# Altium PCB Pcb1.PcbDoc
Units mm, origin at the board's own origin, x right, y up, seen from the top; angles counter-clockwise.
Board outline 26 x 37 mm, 2 copper layers (Top Layer, Bottom Layer), stack 1.569 mm thick; 22 components, 17 nets, 64 pads, 88 vias.
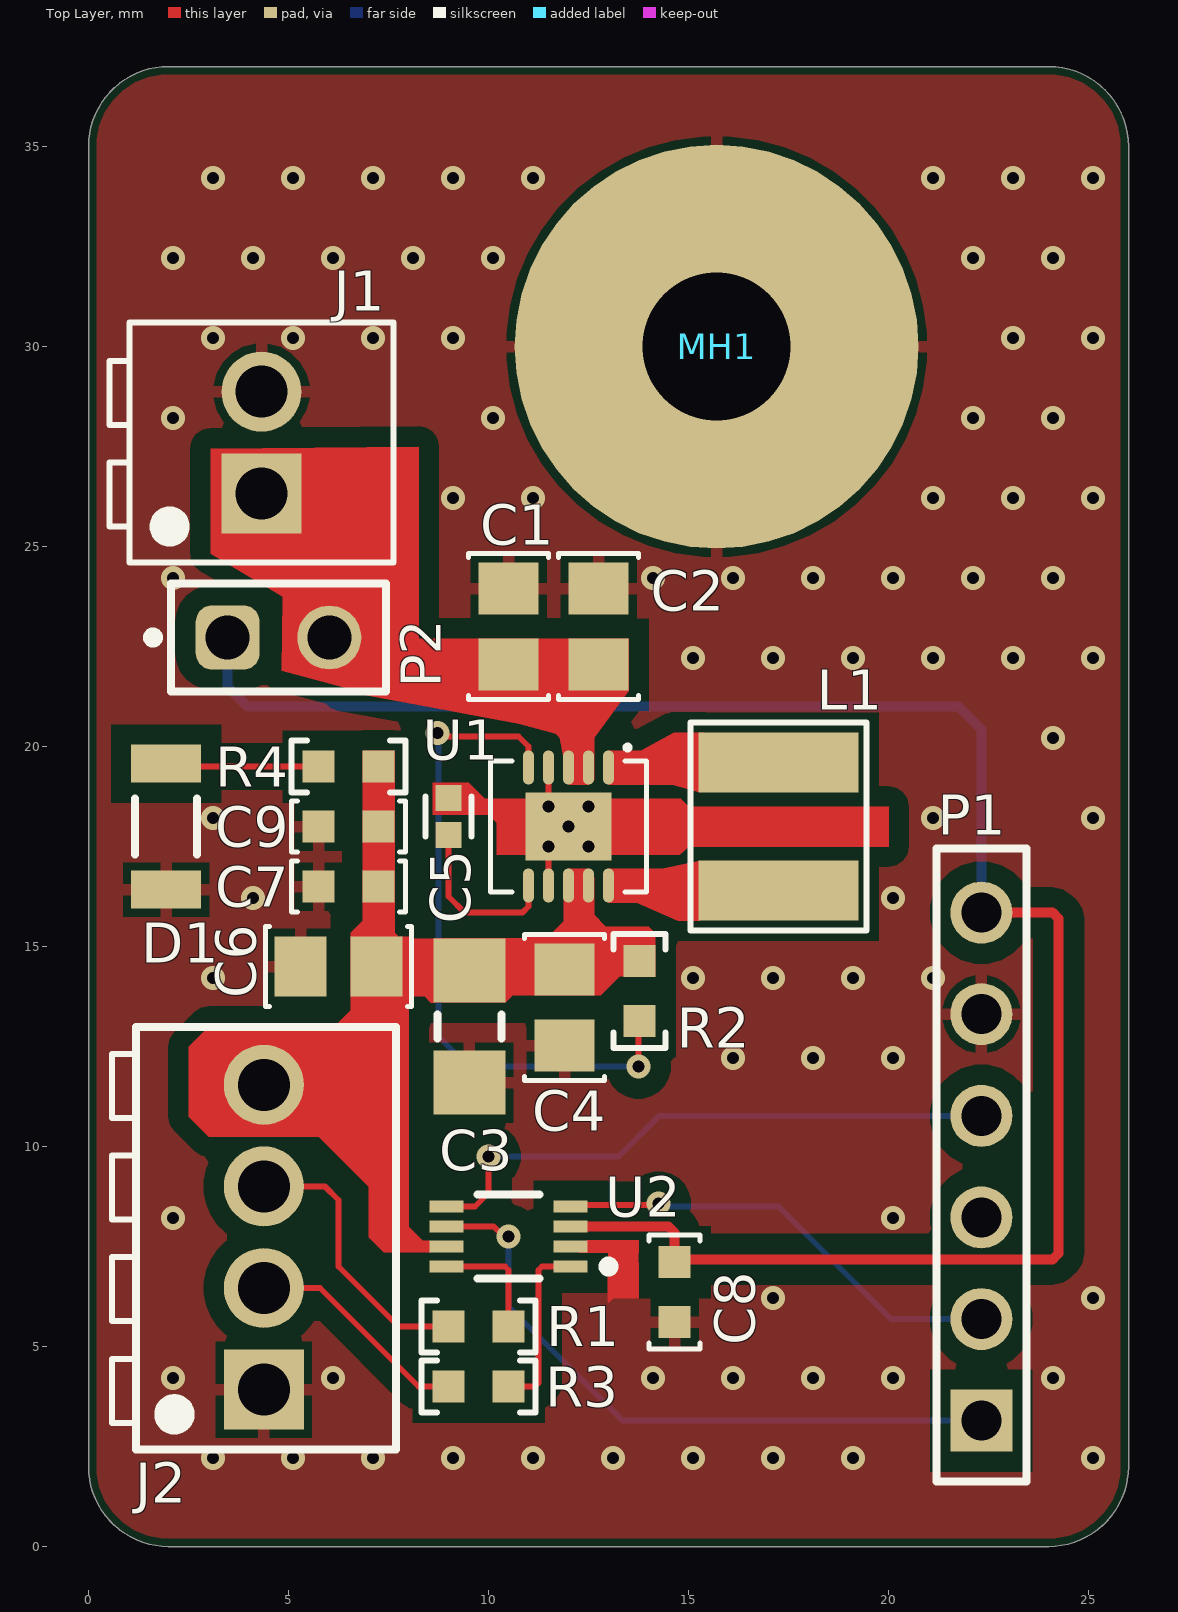
[diagram p0: Top Layer view]
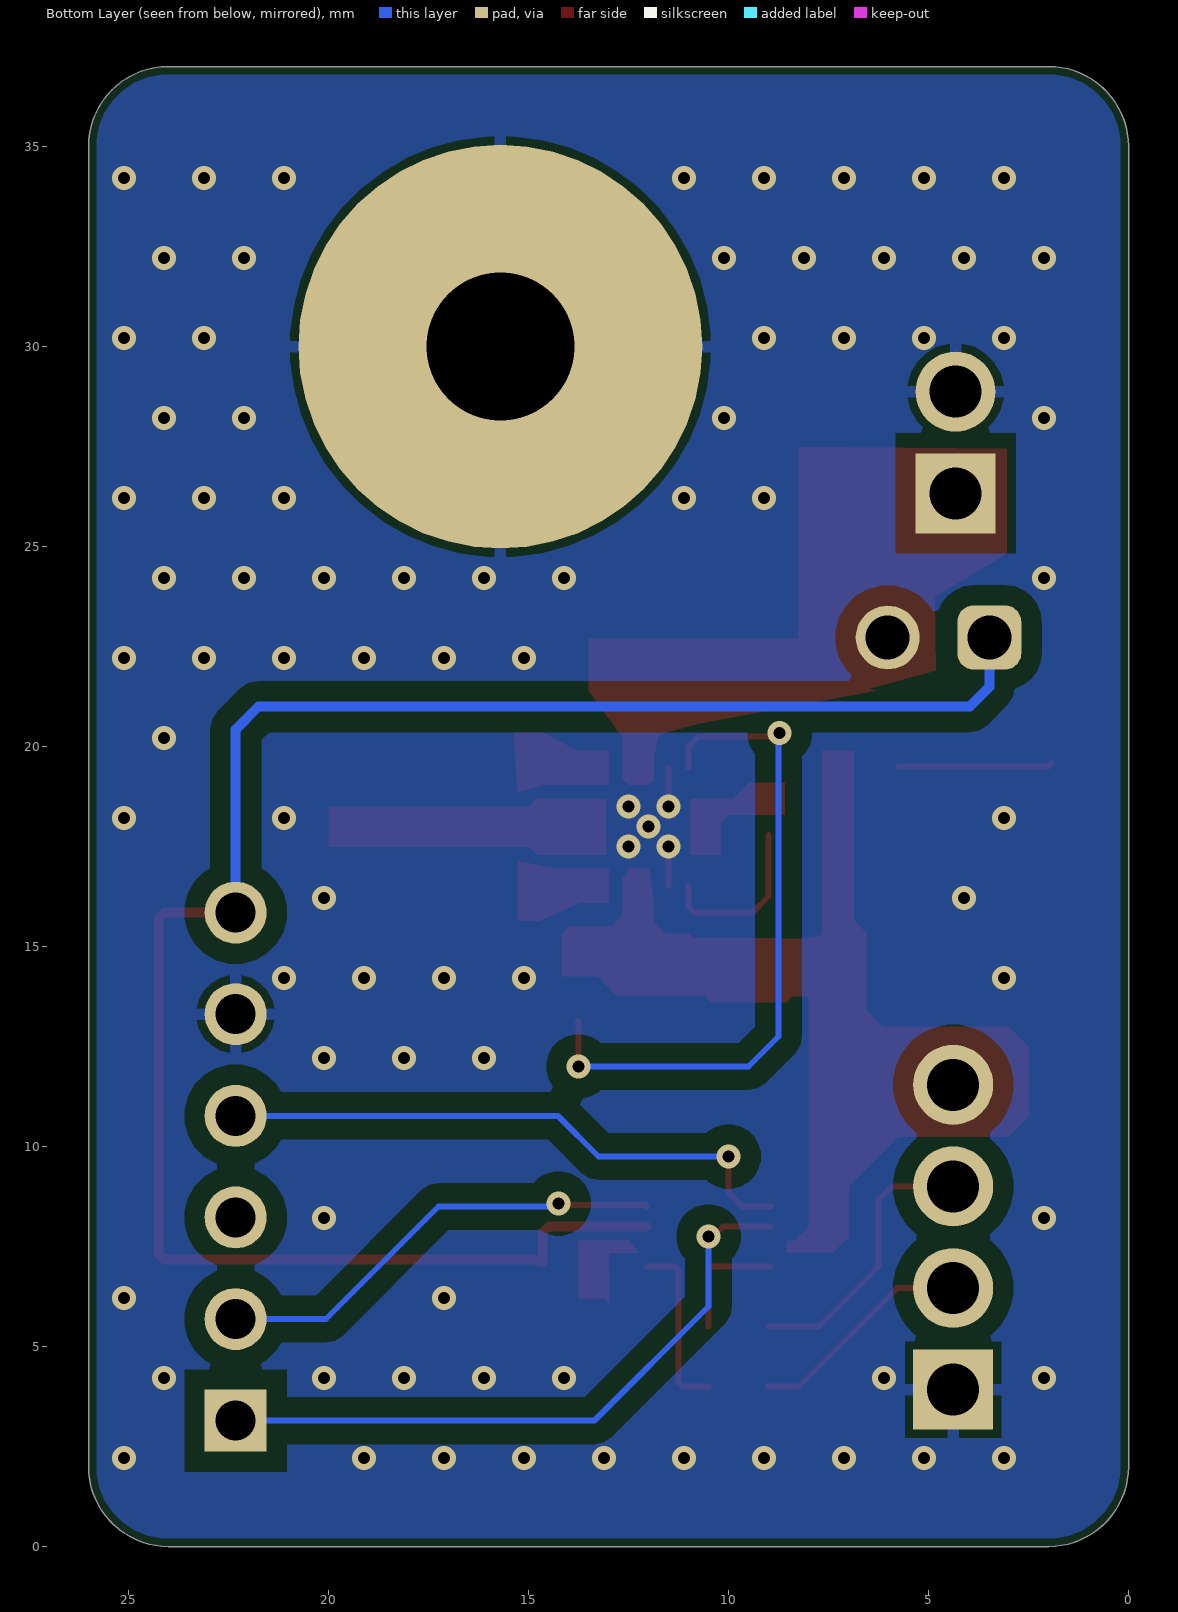
[diagram p1: Bottom Layer view, seen from below]
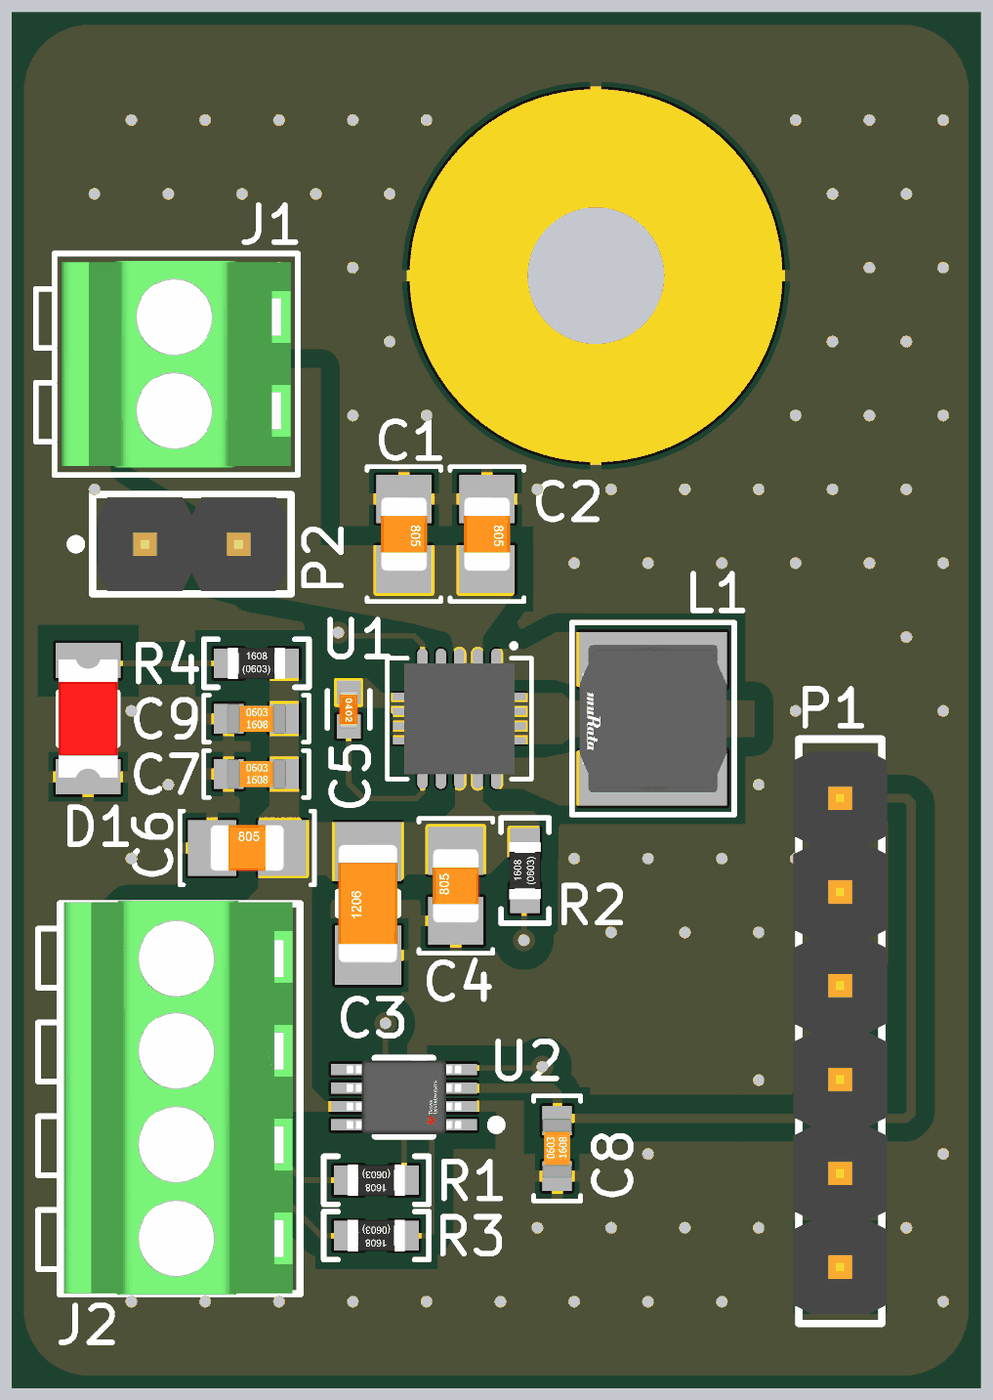
[diagram p2: 3D render of the assembled board from above, using the file's embedded part models]

## Layer stack, top to bottom
Top Solder: solder mask 0.0254, SM-001, Dk 4
Top Layer: signal copper 0.035
Dielectric 1: core 1.4986, Core-043, Dk 4.3
Bottom Layer: signal copper 0.035
Bottom Solder: solder mask 0.0254, SM-001, Dk 4

## Board outline
2,0 cw(c2,2) 0,2 0,35 cw(c2,35) 2,37 24,37 cw(c24,35) 26,35 26,2 cw(c24,2) 24,0

## Design rules (kind name [scope] priority, off if disabled: settings)
BoardOutlineClearance [All] p1: gap=0.2 ignorepadtopadclearanceinfootprint=FALSE
Clearance Clearance_poly [inpoly] p1: gap=0.5 ignorepadtopadclearanceinfootprint=FALSE
Clearance [All] p2: gap=0.15 ignorepadtopadclearanceinfootprint=FALSE
DiffPairsRouting [All] p1: maxlimit=0.125 minlimit=0.125 mostfreqgap=0.125 toplayer_minwidth=0.125 toplayer_maxwidth=0.125 toplayer_prefwidth=0.125 bottomlayer_minwidth=0.125 bottomlayer_maxwidth=0.125 bottomlayer_prefwidth=0.125 maxuncoupledlength=15
HoleSize [All] p1: absolutevalues=TRUE maxlimit=5 minlimit=0.2 maxpercent=80.000 minpercent=20.000
HoleToHoleClearance HoleToHoleClearance_via [All] p1: gap=0.2 allowstackedmicrovias=FALSE
HoleToHoleClearance [All] p2: gap=0.4 allowstackedmicrovias=TRUE
MinimumAnnularRing [All] p1: minimumring=0.15
MinimumSolderMaskSliver [All] p1: minsoldermaskwidth=0.1
PlaneClearance [All] p1: clearance=0.5
PlaneConnect [All] p1: pad.planeconnectstyle=Relief pad.reliefexpansion=0.508 pad.reliefentries=4 pad.reliefconductorwidth=0.254 pad.reliefairgap=0.254 via.planeconnectstyle=Direct via.reliefexpansion=0.508 via.reliefentries=4 via.reliefconductorwidth=0.254 via.reliefairgap=0.254
PolygonConnect [All] p1: thpad.connectstyle=Relief thpad.reliefconductorwidth=0.3 thpad.reliefentries=4 thpad.polygonreliefangle="90 Angle" thpad.airgapwidth=0.2 smdpad.connectstyle=Relief smdpad.reliefconductorwidth=0.3 smdpad.reliefentries=4 smdpad.polygonreliefangle="90 Angle" smdpad.airgapwidth=0.2 via.connectstyle=Direct via.reliefconductorwidth=0.254 via.reliefentries=4 via.polygonreliefangle="90 Angle" via.airgapwidth=0.254
RoutingVias [All] p1: holewidth=0.3 width=0.6 viastyle="Through Hole" minholewidth=0.3 minwidth=0.6 maxholewidth=0.3 maxwidth=0.6
SilkToSilkClearance [All] p1: silktosilkclearance=0
SilkToSolderMaskClearance [IsPad] p1: minsilkscreentomaskgap=0.15 clearancetoexposedcopper=TRUE
SolderMaskExpansion [All] p1: expansion=0.075 istentingtop=FALSE
SupplyNets "Schematic Supply Nets_3" [InNet('VCC_3V3')] p1: voltage=0.000
SupplyNets "Schematic Supply Nets_2" [InNet('GND')] p2: voltage=0.000
SupplyNets "Schematic Supply Nets_1" [InNet('VCC_5V')] p3: voltage=0.000
SupplyNets "Schematic Supply Nets" [InNet('V_IN')] p4: voltage=0.000
Width VCC [InNet('VCC_5V')] p1: maxlimit=0.254 minlimit=0.254 preferedwidth=0.254
Width [InNet('VCC_3V3')] p2: maxlimit=0.25 minlimit=0.25 preferedwidth=0.25
22 further rules are at their usual default settings.

## Classes and differential pairs
component class U_PMOD: P1
component class U_LevelTranslator: C8 C9 U2
component class U_BuckBoost5V: C1 C2 C3 C4 C5 L1 R2 U1
component class HeadSheet: C6 C7 D1 J1 J2 MH1 P2 R1 R3 R4

## Components (designator, comment, footprint, x,y, rotation, side; value= is the part's Value field where it differs from the comment)
C1 "CAP CER 10uF 10V X7R 0805" C_2012[0805] 10.5,23 r270 top value=10u
C2 "CAP CER 10uF 10V X7R 0805" C_2012[0805] 12.75,23 r270 top value=10u
C3 "CAP CER 100uF 10V 1206" C_3216[1206] 9.523,12.995 r90 top value=100u
C4 "CAP CER 10uF 10V X7R 0805" C_2012[0805] 11.905,13.475 r90 top value=10u
C5 "CAP CER 100nF 50V 0402" C_1005[0402] 9,18.25 r270 top value=100n
C6 "CAP CER 10uF 10V X7R 0805" C_2012[0805] 6.25,14.5 r0 top value=10u
C7 "CAP CER 100nF 50V 0603" C_1608[0603] 6.5,16.5 r0 top value=100n
C8 "CAP CER 100nF 50V 0603" C_1608[0603] 14.65,6.363 r90 top value=100n
C9 "CAP CER 100nF 50V 0603" C_1608[0603] 6.5,18 r0 top value=100n
D1 "XL-3216SURC-FB" "LED 1206" 1.94,18 r90 top
J1 "CONN-2MM54-2POS-TERM-BLOCK" CONN_TERM_BLOCK_2POS_100MIL 4.325,27.6 r90 top
J2 "CONN-2MM54-4POS-TERM-BLOCK" CONN_TERM_BLOCK_4POS_100MIL 4.383,7.734 r90 top
L1 "Inductor 1UH 3.2A 32mΩ SMD" L_4040[1515] 17.25,18 r270 top value=1u
MH1 "DNP" MP_M-Hole_#4-40_LOOSE-FIT 15.702,29.998 r0 top locked value="Mounting Hole #4-40 w/ Flat Washer"
P1 "ZX-PZ2.54-1-6PZZ" CONN_HDR_01X06_100MIL 22.322,9.498 r90 top locked
P2 "61300211121" CONN_HDR_2POS_100MILS_TH 4.75,22.725 r0 top locked
R1 "Res 100R 1% 0603" R_1608[0603] 9.75,5.5 r180 top value=100R
R2 "Res 100k 1% 0603" R_1608[0603] 13.779,13.887 r90 top value=100k
R3 "Res 100R 1% 0603" R_1608[0603] 9.75,4 r180 top value=100R
R4 "Res 100R 1% 0603" R_1608[0603] 6.5,19.5 r0 top value=100R
U1 "TPS63061DSCR" U_WSON50P300X300X80-10N 12,18 r0 top locked
U2 "TXU0102DCUR" U_VSSOP50P310X200X90-8N 10.5,7.75 r0 top

## Footprints (in the part's own frame and the unit in brackets; to place one, negate y for a bottom-side part, rotate by r counter-clockwise, add the part's x,y. Pads: shape width x height; smd on the part's side, far side on the other; paste and mask are expansions set on the pad)
C_1005[0402] [mm] "Capacitor MLCC; Body 1.1 x 0.5 mm (LxW typ)"
  rect 0.65x0.65 smd: 1(-0.46,0) 2(0.46,0)
  silkscreen extent -0.5,-0.57 0.5,0.58, body extent -0.51,-0.25 0.51,0.25, height 0.51
C_1608[0603] [mm] "Capacitor MLCC; Body 1.6 x 0.8 mm (LxW typ)"
  rect 0.8x0.8 smd: 1(-0.75,0) 2(0.75,0)
  silkscreen extent -1.43,-0.64 1.43,0.64, body extent -0.8,-0.4 0.8,0.4, height 0.8
C_2012[0805] [mm] "Capacitor MLCC; Body 2.0 x 1.3 mm (LxW typ)"
  rect 1.3x1.5 smd: 1(-0.95,0) 2(0.95,0)
  silkscreen extent -1.83,-1 1.83,1, body extent -1,-0.62 1,0.63, height 0.78
C_3216[1206] [mm] "Capacitor MLCC; Body 3.2 x 1.6 mm (LxW typ)"
  rect 1.6x1.8 smd: 1(-1.4,0) 2(1.4,0)
  silkscreen extent -0.3,-0.8 0.3,0.8, body extent -1.6,-0.8 1.6,0.8, height 1
CONN_HDR_01X06_100MIL [mm] "Header, 1x6 Pins, 2.54mm Pitch"
  rect 1.55x1.55 hole 1: 1(-6.35,0)
  round 1.55 hole 1: 2(-3.81,0) 3(-1.27,0) 4(1.27,0) 5(3.81,0) 6(6.35,0)
  silkscreen extent -7.87,-1.12 7.95,1.12, body extent -7.62,-1.27 7.62,1.27, height 8.57
CONN_HDR_2POS_100MILS_TH [mm] "Pin Header, pitch 2.54 mm, THT, Vertical, single row, 2p"
  rrect50% 1.6x1.6 hole 1.1: 1(-1.27,0)
  round 1.6 hole 1.1: 2(1.27,0)
  silkscreen extent -3.26,-1.35 2.69,1.35, body extent -2.54,-1.27 2.54,1.27, height 8.57
CONN_TERM_BLOCK_2POS_100MIL [mm] "2.54 mm Horizontal Entry Modular, 2 positions"
  rect 2x2 hole 1.3 paste-2539.97 mask+0: 1(-1.27,0)
  round 2 hole 1.3 paste-2539.97 mask+0: 2(1.27,0)
  silkscreen extent -3,-3.3 3,3.8, body extent -2.79,-3.1 2.81,3.1, height 8.53
CONN_TERM_BLOCK_4POS_100MIL [mm] "2.54 mm Horizontal Entry Modular, 4 positions"
  rect 2x2 hole 1.3: 1(-3.81,0)
  round 2 hole 1.3: 2(-1.27,0) 3(1.27,0) 4(3.81,0)
  silkscreen extent -5.31,-3.3 5.25,3.8, body extent -5.34,-3.1 5.34,3.1, height 8.5
L_4040[1515] [mm] "Inductor, 2-Leads, Body 4x4mm"
  rect 1.5x4 smd: 1(-1.6,0) 2(1.6,0)
  silkscreen extent -2.6,-2.2 2.6,2.2, body extent -2.3,-2.2 2.3,2.2, height 0.25
"LED 1206" [mm]
  rect 0.95x1.75 smd: 1(-1.575,0) 2(1.575,0)
  silkscreen extent -0.7,-0.78 0.7,0.78, body extent -1.6,-0.8 1.6,0.8, height 1.1
MP_M-Hole_#4-40_LOOSE-FIT [mm] "Monting Hole #4-40 Loose Fit"
  round 10.1 hole 3.7 paste-2539.97: 1(0,0)
R_1608[0603] [mm] "Chip Resistor; Body 1.6 x 0.8 mm (LxW typ)"
  rect 0.8x0.8 smd: 1(-0.75,0) 2(0.75,0)
  silkscreen extent -1.43,-0.65 1.43,0.65, body extent -0.77,-0.42 0.78,0.43, height 0.45
U_VSSOP50P310X200X90-8N [mm]
  rect 0.85x0.3 smd: 1(1.55,-0.75) 2(1.55,-0.25) 3(1.55,0.25) 4(1.55,0.75) 5(-1.55,0.75) 6(-1.55,0.25) 7(-1.55,-0.25) 8(-1.55,-0.75)
  silkscreen extent -0.78,-1.05 2.63,1.05, body extent -2.05,-1.3 2.05,1.3, height 0.25
U_WSON50P300X300X80-10N [mm]
  oval 0.28x0.85 smd paste+0 mask+0.051: 1(1,1.475) 2(0.5,1.475) 3(0,1.475) 4(-0.5,1.475) 5(-1,1.475) 6(-1,-1.475) 7(-0.5,-1.475) 8(0,-1.475) 9(0.5,-1.475) 10(1,-1.475)
  rect 2.15x1.7 smd paste-1.062 mask+0.051: 11(0,0)
  Top Layer region: -1.06,0.7 -1.8,0.7 -1.8,0.5 -1.06,0.5
  Top Layer region: 1.8,0.7 1.06,0.7 1.06,0.5 1.8,0.5
  Top Layer region: 1.8,0.3 1.06,0.3 1.06,0.1 1.8,0.1
  Top Layer region: -1.06,0.3 -1.8,0.3 -1.8,0.1 -1.06,0.1
  Top Layer region: 1.06,-0.3 1.8,-0.3 1.8,-0.1 1.06,-0.1
  Top Layer region: -1.8,-0.3 -1.06,-0.3 -1.06,-0.1 -1.8,-0.1
  Top Layer region: -1.8,-0.7 -1.06,-0.7 -1.06,-0.5 -1.8,-0.5
  Top Layer region: 1.06,-0.7 1.8,-0.7 1.8,-0.5 1.06,-0.5
  silkscreen extent -1.95,-1.64 1.95,2.04, body extent -1.5,-1.5 1.5,1.5, height 0.77

## Part data
C1 C2 C4 C6: library part CAP004, "Capacitor type 1", Dielectric=X7R, Manufacturer 1=muRata, Manufacturer Part Number 1=GRM21BR71A106KE51L, Rated Voltage=10V, Supplier Part Number 1=C86038, Tolerance=10%, Code CEGEP=KCOND03SM, LibRef=CAP004, Mounting Technology=SMT, Supplier 1=LCSC
C3: library part CAP005, "Capacitor type 1", Dielectric=X5R, Manufacturer 1=Murata, Manufacturer Part Number 1=GRM31CR61A107MEA8L, Rated Voltage=10V, Supplier Part Number 1=C883598, Tolerance=20%, Code CEGEP=KCOND04SM, LibRef=CAP005, Mounting Technology=SMT, Supplier 1=LCSC
C5: library part CAP001, "Capacitor type 1", Dielectric=X7R, Manufacturer 1=Yageo, Manufacturer Part Number 1=CC0402KRX7R9BB104, Rated Voltage=50V, Supplier Part Number 1=C131394, Tolerance=10%, Code CEGEP=KCOND01SM, LibRef=CAP001, Mounting Technology=SMT, Supplier 1=LCSC
C7 C8 C9: library part CAP002, "Capacitor type 1", Dielectric=X7R, Manufacturer 1=Yageo, Manufacturer Part Number 1=CC0603KRX7R9BB104, Rated Voltage=50V, Supplier Part Number 1=C14663, Tolerance=10%, Code CEGEP=COND0143SM, LibRef=CAP002, Mounting Technology=SMT, Supplier 1=LCSC
D1: library part D_LED_RED_1206, "DEL Rouge 1206", Manufacturer 1=XINGLIGHT, Manufacturer 2="Würth Elektronik", Manufacturer Part Number 2=150120RS75000, Supplier Part Number 1=C3646938, Code CEGEP=LEDROUGECLAIR, Localisation=AVP-14, Manufacturer Part Number 1=XL-3216SURC-FB, Mounting Technology=SMT, Supplier 1=LCSC, Supplier 2=Digikey, Supplier Part Number 2=732-4991-1-ND
J1: "CONN TERM BLOCK 2POS 100mil pitch", Manufacturer 1=Dorabo, Manufacturer 2=Amphenol, Manufacturer Part Number 1=DB125-2.54-2P-GN-S, Manufacturer Part Number 2=VN02A1500000G, Supplier Part Number 1=C918120, Mounting Technology=TH, Supplier 1=LCSC, Supplier 2=Digikey, Supplier Part Number 2=VN02A1500000G-ND
J2: "CONN TERM BLOCK 4POS 100mil pitch", Manufacturer 1=Dorabo, Manufacturer 2=Amphenol, Manufacturer Part Number 1=DB125-2.54-4P-GN-S, Manufacturer Part Number 2=VN04A1500000G, Supplier Part Number 1=C918122, Mounting Technology=TH, Supplier 1=LCSC, Supplier 2=Digikey, Supplier Part Number 2=VN04A1500000G-ND
L1: library part IND006, "Inductor type 1", Manufacturer 1="Taiyo Yuden", Manufacturer Part Number 1=LSXND4040TKL1R0NDG, Saturation Current=4A, Supplier Part Number 1=C6891223, Tolerance=30%, DCR=0R032, LibRef=IND006, Mounting Technology=SMT, Supplier 1=LCSC
MH1: library part MH-4-40, "Mounting Hole #4-40 w/ Flat Washer", Supplier Part Number 1=N/A, Manufacturer Part Number 1=DNP, Mounting Technology=N/A
P1: library part CONN-100MIL-HDR-01X06, "Conn. Header 6pos 100mils", Manufacturer 1=Megastar, Manufacturer 2="Würth Elektronik", Manufacturer Part Number 2=61300611121, Supplier Part Number 1=C7501264, Manufacturer Part Number 1=ZX-PZ2.54-1-6PZZ, Mounting Technology=TH, Supplier 1=LCSC, Supplier 2=Digikey, Supplier Part Number 2=732-5319-ND
P2: library part CONN-100MIL-HDR-01X02, "CONN HEADER 2POS 100MIL", Manufacturer 1=Megastar, Manufacturer 2="Würth Elektronik", Manufacturer Part Number 1=ZX-PZ2.54-1-2PZZ, Supplier Part Number 1=C7501260, Manufacturer Part Number 2=61300211121, Mounting Technology=TH, Supplier 1=LCSC
R1 R3 R4: library part RES029, "Resistor type 1", Manufacturer 1=Yageo, Manufacturer Part Number 1=RC0603FR-07100RL, Max Working Voltage=75V, Supplier Part Number 1=C105588, Tolerance=1%, LibRef=RES029, Mounting Technology=SMT, Puissance=1/10W, Supplier 1=LCSC
R2: library part RES002, "Resistor type 1", Manufacturer 1=Yageo, Manufacturer Part Number 1=RC0603FR-07100KL, Max Working Voltage=75V, Supplier Part Number 1=C14675, Tolerance=1%, LibRef=RES002, Mounting Technology=SMT, Puissance=1/10W, Supplier 1=LCSC
U1: library part U_TPS63061DSC, "IC REG BUCK BOOST 5V 2A 10WSON", Manufacturer 1=TI, Supplier Part Number 1=C2876326, Manufacturer Part Number 1=TPS63061DSCR, Mounting Technology=SMT, Supplier 1=LCSC, Supplier 2=Digikey, Supplier Part Number 2=296-30205-1-ND
U2: library part U_TXU0102DCU, "Two channel fixed-direction level shifter 8-VSSOP", Manufacturer 1=TI, Supplier Part Number 1=C5217871, Manufacturer Part Number 1=TXU0102DCUR, Mounting Technology=SMT, Supplier 1=LCSC, Supplier 2=Digikey, Supplier Part Number 2=296-TXU0102DCURCT-ND

## Via types
v1: diameter 0.6, hole 0.3, Top Layer to Bottom Layer, tented both sides, 88 vias

## Nets (pads, with @x,y where several pads share a name; then routed paths per layer and width w, separated by ;. In a path a pad name is that pad's centre, name@x,y a point inside that pad or via, vN(x,y) a via of type N, cw(c..) or ccw(c..) an arc to the next point about the centre after c; other vN are vias at no path point)
GND: C1.1 C2.1 C3.1 C4.1 C5.1 C6.1 C7.1 C8.1 C9.1 D1.1 J1.2 J2.1 MH1.1 P1.5 U1.4 U1.7 U1.11 U2.2 | length 2.2
  Top Layer w0.15: U1.7 v1(11.5,17.5) ; v1(11.5,18.5) U1.4
  Top Layer w0.254: C5.1 C5.1@9.166,18.544
  other v1: 3.113,2.213 5.113,2.213 7.113,2.213 9.113,2.213 11.113,2.213 13.113,2.213 15.113,2.213 17.113,2.213 19.113,2.213 25.113,2.213 2.113,4.213 6.113,4.213 14.113,4.213 16.113,4.213 18.113,4.213 20.113,4.213 24.113,4.213 17.113,6.213 25.113,6.213 2.113,8.213 20.113,8.213 16.113,12.213 18.113,12.213 20.113,12.213 3.113,14.213 15.113,14.213 17.113,14.213 19.113,14.213 21.113,14.213 4.113,16.213 20.113,16.213 12.5,17.5 12,18 3.113,18.213 21.113,18.213 25.113,18.213 12.5,18.5 24.113,20.213 15.113,22.213 17.113,22.213 19.113,22.213 21.113,22.213 23.113,22.213 25.113,22.213 2.113,24.213 14.113,24.213 16.113,24.213 18.113,24.213 20.113,24.213 22.113,24.213 24.113,24.213 9.113,26.213 11.113,26.213 21.113,26.213 23.113,26.213 25.113,26.213 2.113,28.213 10.113,28.213 22.113,28.213 24.113,28.213 3.113,30.213 5.113,30.213 7.113,30.213 9.113,30.213 23.113,30.213 25.113,30.213 2.113,32.213 4.113,32.213 6.113,32.213 8.113,32.213 10.113,32.213 22.113,32.213 24.113,32.213 3.113,34.213 5.113,34.213 7.113,34.213 9.113,34.213 11.113,34.213 21.113,34.213 23.113,34.213 25.113,34.213
IN_A_1: P1.4 U2.5 | length 14.8
  Top Layer w0.15: U2.5 9.662,8.5 10,8.838 v1(10,9.75)
  Bottom Layer w0.15: v1(10,9.75) 13.25,9.75 14.268,10.768 P1.4
IN_A_2: P1.2 U2.4 | length 11.5
  Top Layer w0.15: U2.4 12.088,8.538 14.213,8.538 v1(14.25,8.575)
  Bottom Layer w0.15: v1(14.25,8.575) 14.325,8.5 17.25,8.5 20.062,5.688 P1.2
MISO: P1.3
NetC5_2: C5.2 U1.6 | length 4.3
  Top Layer w0.15: C5.2 9,16.251 9.406,15.845 10.845,15.845 11,16 U1.6
NetD1_2: D1.2 R4.1 | length 3.8
  Top Layer w0.15: D1.2 2.015,19.5 R4.1
NetJ2_2: J2.2 R3.2 | length 5.6
  Top Layer w0.15: J2.2 5.786,6.464 8.25,4 R3.2
NetJ2_3: J2.3 R1.2 | length 7
  Top Layer w0.15: J2.3 5.908,9.004 6.25,8.662 6.25,7 7.75,5.5 R1.2
NetL1_1: L1.1 U1.1
NetL1_2: L1.2 U1.10
NetR2_1: R2.1 U1.5 | length 17
  Top Layer w0.15: v1(8.72,20.332) 8.802,20.25 10.75,20.25 11,20 U1.5 ; v1(13.75,12) 13.75,13.108 R2.1
  Bottom Layer w0.15: v1(8.72,20.332) 8.75,20.302 8.75,12.75 9.5,12 v1(13.75,12)
OE: P1.1 U2.6 | length 16.4
  Top Layer w0.15: U2.6 10.128,8 10.378,7.75 v1(10.5,7.75)
  Bottom Layer w0.15: v1(10.5,7.75) 10.5,6 13.352,3.148 P1.1
OUT_B_1: R1.1 U2.8 | length 3
  Top Layer w0.15: U2.8 10.412,7 10.5,6.912 R1.1
OUT_B_2: R3.1 U2.1 | length 4.4
  Top Layer w0.15: R3.1 11.162,4 11.25,4.088 11.25,6.912 11.338,7 U2.1
V_IN: C1.2 C2.2 J1.1 P2.2 U1.2 U1.3
VCC_3V3: C8.2 P1.6 P2.1 U2.3 | length 48.5
  Top Layer w0.25: U2.3 14.5,8 14.65,7.85 C8.2 14.925,7.18 22.259,7.18 ccw(c22.322,8.228) 22.324,7.178 24.104,7.18 24.177,7.253 24.25,7.326 24.25,15.701 24.104,15.848 P1.6
  Bottom Layer w0.25: P2.1 3.48,21.489 3.969,21 21.75,21 22.322,20.428 P1.6
VCC_5V: C3.2 C4.2 C6.2 C7.2 C9.2 J2.4 R2.2 R4.2 U1.8 U1.9 U2.7

## Polygon pours and split planes (outlines as drawn)
GND on Top Layer "GND_L01_P000" (solid, remove dead copper, pour order 0): 2,0 cw(c2,2) 0,2 0,35 cw(c2,35) 2,37 24,37 cw(c24,35) 26,35 26,2 cw(c24,2) 24,0
GND on Bottom Layer "GND_L02_P002" (solid, pour order 2): 2,0 cw(c2,2) 0,2 0,35 cw(c2,35) 2,37 24,37 cw(c24,35) 26,35 26,2 cw(c24,2) 24,0

## Other copper
Top Layer:
  region net GND: 12.985,6.848 12.985,6.115 13,6.1 13.113,6.213 13.75,6.213 13.75,7.089 13.746,7.093
  region net GND: 12.975,6.838 12.996,6.859 12.996,7.348 13.746,7.348 13.746,6.838
  region net GND: 9.5,19.1 9.9,18.7 10.2,18.7 10.2,18.1 10,18.3 9.5,18.3
  region net GND: 8.6,18.3 9.5,18.3 9.5,19.1 8.6,19.1
  region net GND: 12.246,7.348 13.746,7.348 13.748,7.345 13.751,7.348 13.751,7.654 12.47,7.654
  region net VCC_5V: 5.75,10.25 7,9 7,10.25
  region net VCC_5V: 8.536,7.646 8.354,7.646 8,8 8,11.25 6.75,11.25 7,11 7,7.734 7.392,7.342 7.401,7.352 8.554,7.352
  region net VCC_5V: 6.852,18.384 6.859,18.39 6.859,19.891 7.652,19.891 7.652,18.355
  region net GND: 10.2,18.7 10.2,17.3 10.94,17.3 10.94,18.7
  region net GND: 13.06,18.696 13.804,18.696 14.804,18.696 15,18.5 20,18.5 20,17.5 15,17.5 14.783,17.3 14.7,17.3 13.06,17.3
  region net V_IN: 10.75,22.7 8.2,22.7 7.46,21.548
  region net VCC_5V: 6.802,14.001 6.553,13.752 6.553,13.411 6.141,13 3,13 2.5,12.5 2.5,10.75 3,10.25 7,10.25 8,11.25 8,13.998
  region net VCC_5V: 8.641,15.197 8.053,15.197 8,15.25 7.75,15.25 7.66,15.34 7.66,16.106 7.655,16.111 7.655,17.597 7.649,17.602 7.655,17.607 7.655,18.379 6.868,18.379 6.858,18.389 6.852,18.384 6.852,15.643 6.559,15.35 6.559,13.759 6.555,13.754 6.558,13.751 8.406,13.751 8.557,13.599 8.673,13.599
  region net VCC_5V: 11.99,16.947 12.516,16.947 12.516,16.851 12.642,16.726 12.639,16.723 12.639,15.789 12.928,15.5 14,15.5 14.171,15.329 14.171,14.258 14.177,14.252 13.281,14.252 12.808,13.779 10.605,13.779 10.427,13.601 8.641,13.601 8.641,15.185 8.635,15.191 8.648,15.203 10.869,15.203 10.98,15.313 11.563,15.313 11.882,15.632 11.882,16.191
  region net V_IN: 12,19.05 12.5,19.05 12.644,19.167 12.639,20.218 13.5,21.4 13.5,22.7 9.75,22.7 6.325,21.4 10.75,20.575 11.675,20.325 11.775,20.225 11.863,19.775 11.863,19.166
  region net V_IN: 8.25,27.5 3.05,27.45 3.05,24.825 4.85,23.75 4.825,21.9 7.25,21.25 8.25,21.75
  region net NetL1_2: 13.7,16.95 14.325,16.95 15.275,17.15 15.275,15.65 14.725,15.65 13.7,16.1
  region net NetL1_1: 15.375,20.35 14.625,20.35 13.8,19.9 13.8,19.05 14.587,19.05 15.264,18.852
  region net NetL1_1: 13,19.9 13.8,19.9 13.8,19.05 13.4,19.05 13,19.05
  region net NetL1_2: 13,16.95 13.7,16.95 13.7,16.1 13,16.1

## Silkscreen, mask and mechanical layers (free items; w line width, h text height)
Board:
  lines w0.254: 0,2 ccw(c2,2) 2,0 ; 0,35 cw(c2,35) 2,37 ; 24,0 ccw(c24,2) 26,2 ; 24,37 cw(c24,35) 26,35